# Allegro board CC2541EM.brd
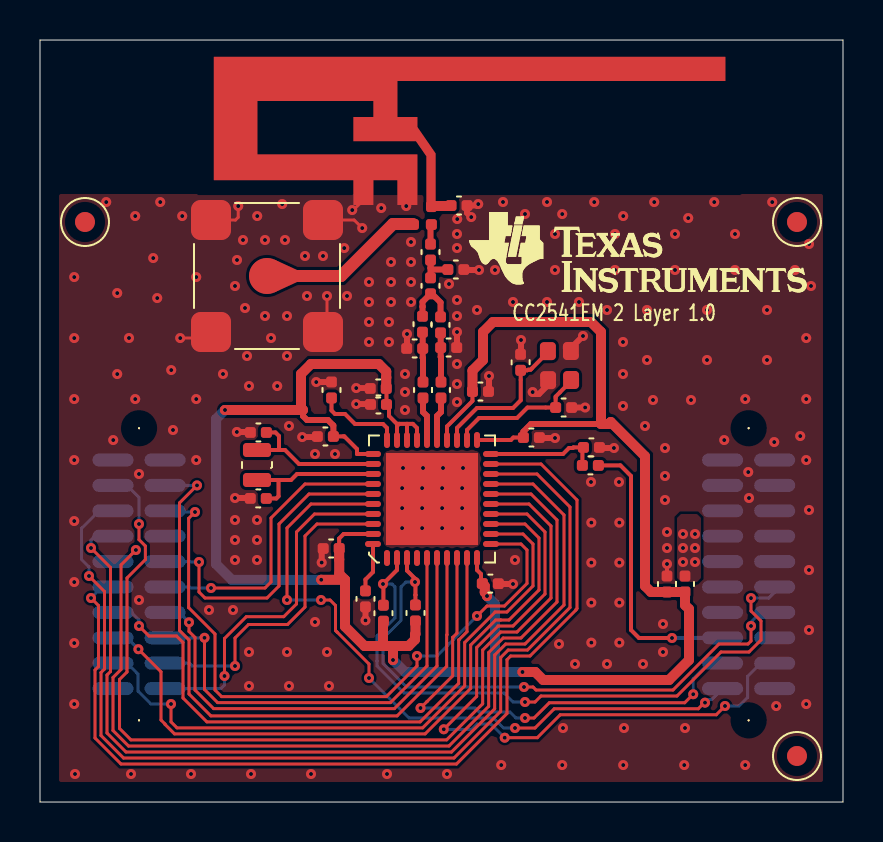
[diagram p0: board, top side]
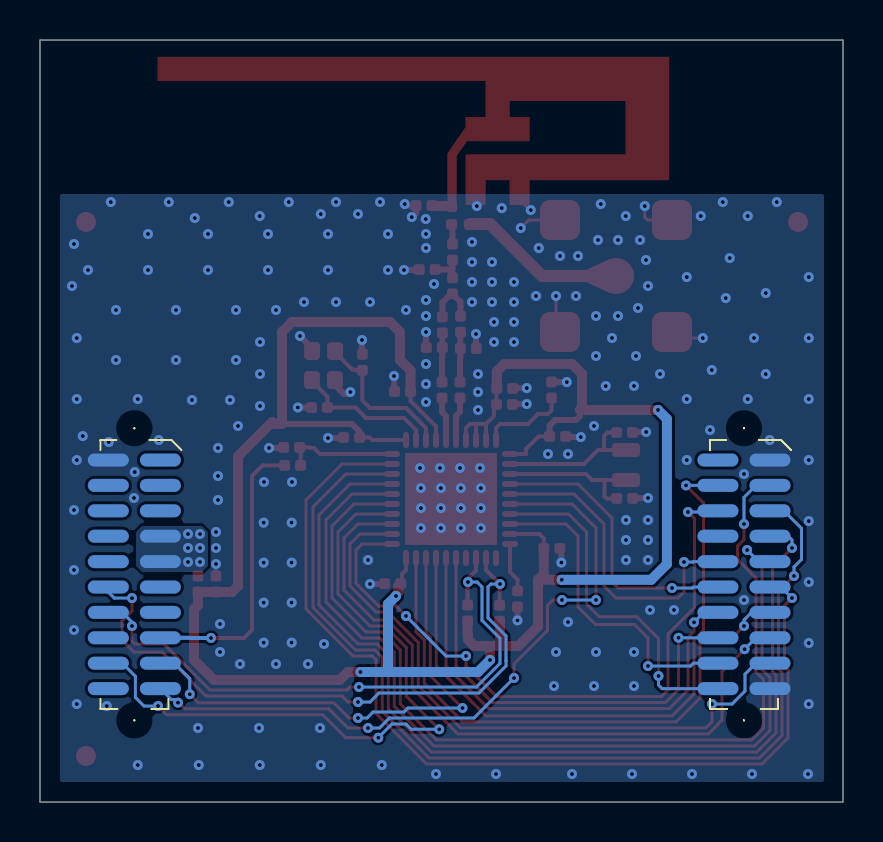
[diagram p1: board, bottom side, seen from below]

Outline 40.15 x 38.1 mm; copper layers: TOP, BOTTOM. Coordinates in mm from the lower left corner of the outline.
Outline path: 0,38.1 0,0 40.15,0 40.15,38.1 0,38.1

## Placement (name value [footprint] x y rotation side)
A1  2.4GHz  [ANTENNA_DN007]  19.55 30.1 0 top
C1  2.2uF  [CAPC1005X60L]  31.35 10.5 90 top
C101  100nF  [CAPC1005X60L]  22.12 10.92 359.5 top
C201  1nF  [CAPC1005X60L]  27.97 17.73 180 top
C211  100nF  [CAPC1005X60L]  24.17 18.22 0 top
C221  12pF  [CAPC1005X60L]  25.78 19.72 0.1 top
C231  12pF  [CAPC1005X60L]  24.03 21.59 90.4 top
C241  100nF  [CAPC1005X60L]  21.62 20.52 0 top
C251  18pF  [CAPC1005X60N]  20.05 20.2 90 top
C252  1pF  [CAPC1005X60N]  20.03 23.45 89.9 top
C253  1pF  [CAPC1005X60N]  20.39 26.62 0 top
C254  DNM  [CAPC1005X60L]  20.55 29.82 0 top
C261  18pF  [CAPC1005X60N]  19.15 20.2 90 top
C262  1pF  [CAPC1005X60N]  19.14 22.68 180 top
C271  100nF  [CAPC1005X60L]  17.32 19.88 179.9 top
C272  220pF  [CAPC1005X60L]  17.31 20.68 180.1 top
C311  100nF  [CAPC1005X60L]  14.67 18.28 180.2 top
C321  15pF  [CAPC1005X60N]  11.32 18.48 180 top
C331  15pF  [CAPC1005X60N]  11.31 15.18 179.8 top
C391  1uF  [CAPC1005X60N]  14.96 12.68 180.2 top
C401  1uF  [CAPC1005X60N]  16.27 10.56 270 top
FIDU1  FIDU_1MM  [FID100X115]  37.85 29 0 top
FIDU2  FIDU_1MM  [FID100X115]  37.85 2.3 0 top
FIDU3  FIDU_1MM  [FID100X115]  2.25 29 0 top
J1  SMA-10V21-TGG  [HUSTSAN_SMA10V21TGGAN]  11.35 26.3 0 top
L1  BLM15HG102SN1  [INDC1005X60L]  32.25 11.3 270 top
L251  2nH  [INDC1005X60N]  20.03 22.72 0 top
L252  1nH  [INDC1005X60L]  19.53 25.41 90.1 top
L253  3nH  [INDC1005X60N]  19.53 27.1 90.1 top
L261  2nH  [INDC1005X60N]  19.12 23.49 89.9 top
NOREF  -  []  0 36.8 0 top
NOREF#2  -  []  22.45 29.5 0 top
NOREF#3  -  []  36.94 0 90 top
P1  SFM-110-02-S-D-A-K-TR  [SAMTEC_SFM11002AN]  3.65 17.1 0 bottom
P2  SFM-110-02-S-D-A-K-TR  [SAMTEC_SFM11002AN]  34.13 17.1 0 bottom
R21  10k  [RESC1005X40N]  17.17 9.84 270.2 top
R31  10k  [RESC1005X40N]  18.77 9.85 270.1 top
R201  2.7k  [RESC1005X40L]  27.92 16.83 180 top
R251  0  [RESC1005X40BL]  19.57 28.87 179.9 top
R301  56k  [RESC1005X40L]  14.57 21 270 top
U2  CC2541F256  [QFNFC50P600X600X100-41L]  17.35 12.2 0 top
X1  32MHz  [XTAL_FA128L]  26.55 21.1 90.3 top
X2  32.768kHz  [XTAL_FC12MN]  10.85 16.1 90 top

## Library data of the parts
A1 = ANTENNA_DN007
C1 C101 C201 C211 C221 C231 C241 C251-C254 C261 C262 C271 C272 C311 C321 C331 C391 C401 = CAPACITOR: alternate symbols: (CAPC1005X60L,CAPC1005X60M)
FIDU1-FIDU3 = FIDMARK
J1 = CONN_COAX_1+4: alternate symbols: (HUSTSAN_SMA10V21TGGL,HUSTSAN_SMA10V21TGGM)
L1 L251-L253 L261 = INDUCTOR: alternate symbols: (INDC1005X60L,INDC1005X60M)
P1 P2 = CONN_HEADER_2X10_P_S: alternate symbols: (SAMTEC_SFM11002AL,SAMTEC_SFM11002AM)
R21 R31 R201 R301 = RESISTOR: alternate symbols: (RESC1005X40L,RESC1005X40M)
R251 = RESISTOR_3PORTS: alternate symbols: (RESC1005X40AL,RESC1005X40AM,RESC1005X40BL,RESC1005X40BM)
U2 = IC_RF_CC2541_QFN40_1: alternate symbols: (QFNFC50P600X600X100-41L,QFNFC50P600X600X100-41M)
X1 = XTAL_4: alternate symbols: (XTAL_FA128L,XTAL_FA128M)
X2 = XTAL: alternate symbols: (XTAL_FC12ML,XTAL_FC12MM)

## Footprints (pads in the part's own frame, mm; a bottom-side part is the same pattern mirrored in y, then rotated)
ANTENNA_DN007
  rect 0.46x0.5 smd: 1(0,0)
  rect 1x0.5 smd: 2(-1.18,0) 3(-3.38,0)
CAPC1005X60L
  custom 0.55x0.54 smd: 1(0,0) 2(0.8,0)
CAPC1005X60N
  custom 0.55x0.54 smd: 1(0,0) 2(0.8,0)
FID100X115
  oval 1x1 smd: 1(0,0)
HUSTSAN_SMA10V21TGGAN
  round 1.801 smd: 1(0,0)
  custom 2x2 smd: 2(-2.8,-2.8) 3(2.8,-2.8) 4(2.8,2.8) 5(-2.8,2.8)
INDC1005X60L
  custom 0.55x0.54 smd: 1(0,0) 2(0.8,0)
INDC1005X60N
  custom 0.55x0.54 smd: 1(0,0) 2(0.8,0)
QFNFC50P600X600X100-41L
  oval 0.3x0.8 smd: 1(0,0) 2(0.5,0) 3(1,0) 4(1.5,0) 5(2,0) 6(2.5,0) 7(3,0) 8(3.5,0) 9(4,0) 10(4.5,0) 21(4.5,5.9) 22(4,5.9) 23(3.5,5.9) 24(3,5.9) 25(2.5,5.9) 26(2,5.9) 27(1.5,5.9) 28(1,5.9) 29(0.5,5.9) 30(0,5.9)
  oval 0.8x0.3 smd: 11(5.2,0.7) 12(5.2,1.2) 13(5.2,1.7) 14(5.2,2.2) 15(5.2,2.7) 16(5.2,3.2) 17(5.2,3.7) 18(5.2,4.2) 19(5.2,4.7) 20(5.2,5.2) 31(-0.7,5.2) 32(-0.7,4.7) 33(-0.7,4.2) 34(-0.7,3.7) 35(-0.7,3.2) 36(-0.7,2.7) 37(-0.7,2.2) 38(-0.7,1.7) 39(-0.7,1.2) 40(-0.7,0.7)
  rect 4.6x4.6 smd: 41(2.25,2.95)
RESC1005X40BL
  custom 0.54x0.55 smd: 1(0,-0.9)
  custom 0.55x0.54 smd: 2(0,0) 3(0.9,0)
RESC1005X40L
  custom 0.55x0.54 smd: 1(0,0) 2(0.8,0)
RESC1005X40N
  custom 0.55x0.54 smd: 1(0,0) 2(0.8,0)
SAMTEC_SFM11002AN
  round 0.099 hole 1.501 unplated: (1.302,-1.588) (1.302,13.018)
  oval 2.05x0.65 smd: 1(0,0) 2(2.604,0) 3(0,1.27) 4(2.604,1.27) 5(0,2.54) 6(2.604,2.54) 7(0,3.81) 8(2.604,3.81) 9(0,5.08) 10(2.604,5.08) 11(0,6.35) 12(2.604,6.35) 13(0,7.62) 14(2.604,7.62) 15(0,8.89) 16(2.604,8.89) 17(0,10.16) 18(2.604,10.16) 19(0,11.43) 20(2.604,11.43)
XTAL_FA128L
  custom 0.9x0.798 smd: 1(0,0) 2(1.45,0) 3(1.45,1.15) 4(0,1.15)
XTAL_FC12MN
  custom 0.7x1.402 smd: 1(0,0) 2(1.5,0)

## Nets
GND_SIGNAL: A1.2(GND_2) A1.3(GND_3) C1.2 C101.2 C201.1 C211.2 C221.2 C231.2 C241.2 C253.2 C254.2 C262.2 C271.2 C272.2 C311.2 C321.2 C331.2 C391.2 C401.2 J1.2 J1.3 J1.4 J1.5 L251.2 P1.1 P1.19 P2.2 R301.1 U2.41(GND/EGP) X1.2 X1.4
VDD: C1.1 C101.1 C211.1 C241.1 C271.1 C272.1 C311.1 C391.1 L1.2 R21.2 R31.2 U2.10(DVDD2) U2.21(AVDD5) U2.24(AVDD3) U2.27(AVDD2) U2.28(AVDD1) U2.29(AVDD4) U2.31(AVDD6) U2.39(DVDD1)
VDD_EB: L1.1 P2.7 P2.9
P0_0: P1.11 U2.19(P0_0)
P0_1: P1.5 U2.18(P0_1)
P0_2: P1.7 U2.17(P0_2)
P0_3: P1.9 U2.16(P0_3)
P0_4: P1.3 U2.15(P0_4)
P0_5: P2.18 U2.14(P0_5)
P0_6: P1.15 U2.13(P0_6)
P0_7: P1.17 U2.12(P0_7)
P1_0: P1.6 U2.11(P1_0)
P1_1: P1.13 U2.9(P1_1)
P1_2: P2.17 U2.8(P1_2)
P1_3: P1.4 U2.7(P1_3)
P1_4: P1.14 U2.6(P1_4)
P1_5: P1.16 U2.5(P1_5)
P1_6: P1.18 U2.38(P1_6)
P1_7: P1.20 U2.37(P1_7)
P2_0: P2.19 U2.36(P2_0)
P2_1: P1.10 U2.35(P2_1)
P2_2: P1.12 U2.34(P2_2)
RESET_N: C201.2 R201.2 U2.20(NRESET)
RF_N: C261.1 U2.26(RF_N)
RF_P: C251.1 U2.25(RF_P)
SCL: P2.12 R21.1 U2.2(SCL)
SDA: P2.14 R31.1 U2.3(SDA)
N177477: C231.1 U2.23(XOSC_Q2) X1.3
N177564: C221.1 U2.22(XOSC_Q1) X1.1
N182554: J1.1 R251.3
N183414: P2.15 R201.1
N211544: A1.1(FEED_1) C254.1 R251.1
N231514: C331.1 U2.33(P2_3/XOSC32K_Q2) X2.1
N231518: C321.1 U2.32(P2_4/XOSC32K_Q1) X2.2
N236105: C251.2 C252.1 L251.1
N236109: C261.2 C262.1 L261.1
N236242: C252.2 L252.1 L261.2
N236262: C253.1 L252.2 L253.1
N236577: L253.2 R251.2
N239702: C401.1 U2.40(DCOUPL)
N239709: R301.2 U2.30(RBIAS)

Pads without a net: FIDU1 1; FIDU2 1; FIDU3 1; P1 2 8; P2 1 3 4 5 6 8 10 11 13 16 20; U2 1 4

## Via types
v1: diameter 0.5, hole 0.2, TOP to BOTTOM, 273 vias

## Routing (per net, layer and track width the routed paths; a pad name or vN(x,y) marks a point on that pad's centre or on a via; arc(x,y) is an arc through that point)
GND_SIGNAL: length 25.4
  TOP w0.15: J1.5 9.78,29.1 9.91,29.23 v1(9.91,29.8) ; v1(16.11,28.7) 15.71,29.1 J1.4 ; A1.3 15.67,29.6 v1(15.61,29.6) ; J1.2 8.25,23.2 v1(7.01,23.2) ; J1.3 14.35,23.7 v1(14.35,25.3) ; A1.2 18.31,30.04 v1(18.31,29.8)
  TOP w0.2: v1(31.35,11.9) C1.2
  TOP w0.3: v1(24.63,20.5) 24.73,20.4 24.95,20.4 25.4,20.85 25.4,21.09 ; C201.1 28,17.7 v1(28.7,17.7) ; C211.2 24.99,18.2 v1(25.75,18.2) ; 10.52,18.48 10.5,18.5 v1(9.84,18.5) ; 14.16,12.67 14.08,12.6 v1(14.08,11.97) ; X1.2 26.55,22.7 v1(27.15,23.3) ; 13.87,18.27 13.84,18.25 v1(13.11,18.25) ; C331.2 10.49,15.2 v1(9.75,15.2) ; v1(24.05,23.1) 24.05,22.41 24.03,22.38 ; v1(18.35,23.4) 18.35,22.69 18.34,22.68 ; v1(20.85,23.5) 20.85,22.74 L251.2 ; v1(22.45,21.3) 22.45,20.55 C241.2 ; v1(21.91,29.9) 21.84,29.82 C254.2 21.35,29.46 v1(21.56,29.25) ; v1(13.81,21) 14.57,21 R301.1 ; v1(16.28,9.08) C401.2 ; v1(15.81,20.7) 16.49,20.7 C272.2 ; C271.2 16.5,19.9 v1(15.81,19.9) ; v1(27.26,19.73) C221.2 ; C253.2 21.22,26.6 v1(21.95,26.6) ; 22.92,10.92 22.93,10.9 v1(23.65,10.9)
  vias: v1(1.71,26.25) v1(1.71,23.2) v1(1.71,20.15) v1(1.71,17.1) v1(1.71,14.05) v1(1.71,11) v1(1.71,7.95) v1(1.71,4.9) v1(1.75,1.4) v1(3.31,30) v1(3.66,18.1) v1(3.86,25.45) v1(3.86,21.4) v1(4.45,23.2) v1(4.55,1.4) v1(4.76,29.3) v1(4.76,20.15) v1(4.95,16.4) v1(4.95,10.1) v1(5.66,27.2) v1(5.86,25.2) v1(6.01,30) v1(6.56,21.6) v1(6.65,18.6) v1(7.11,29.3) v1(7.55,1.4) v1(7.81,26.25) v1(7.81,20.15) v1(7.81,17.1) v1(8.45,9.6) v1(9.15,21.4) v1(9.65,9.6) v1(9.75,25.8) v1(9.75,14.1) v1(9.75,13.1) v1(9.75,12.1) v1(9.85,27.1) v1(10.15,28.1) v1(10.25,24.7) v1(10.35,22.3) v1(10.45,20.8) v1(10.45,7.5) v1(10.45,5.8) v1(10.55,1.4) v1(10.86,29.3) v1(10.85,14.1) v1(10.85,13.1) v1(10.85,12.1) v1(11.25,28.1) v1(11.25,24.3) v1(11.55,23.2) v1(11.86,20.8) v1(12.11,29.9) v1(12.25,28.1) v1(12.35,24.3) v1(12.35,22.3) v1(12.35,7.5) v1(12.45,18.8) v1(12.45,5.8) v1(13.25,27.3) v1(13.35,25.3) v1(13.55,1.4) v1(13.75,17.4) v1(13.75,9) v1(14.15,27.3) v1(14.35,7.5) v1(14.45,5.8) v1(14.75,17.4) v1(15.21,27.7) v1(15.35,25.3) v1(16.45,26) v1(16.45,25) v1(16.45,24) v1(16.45,23) v1(17.06,29.7) v1(17.35,1.4) v1(17.45,24) v1(17.45,23) v1(17.55,27) v1(17.55,26) v1(17.55,25) v1(18.15,16.7) v1(18.11,15.7) v1(18.11,14.7) v1(18.11,13.7) v1(18.25,21.4) v1(18.25,20.5) v1(18.25,19.6) v1(18.55,28) v1(18.55,27) v1(18.55,26) v1(18.55,25) v1(19.15,16.7) v1(19.11,15.7) v1(19.11,14.7) v1(19.11,13.7) v1(20.15,16.7) v1(20.11,15.7) v1(20.11,14.7) v1(20.11,13.7) v1(20.35,1.4) v1(20.45,25.9) v1(20.86,29.15) v1(20.85,28.4) v1(20.85,27.7) v1(20.85,25.1) v1(20.85,24.3) v1(20.85,21.9) v1(20.85,20.9) v1(20.85,20) v1(21.15,16.7) v1(21.11,15.7) v1(21.11,14.7) v1(21.11,13.7) v1(21.85,24.6) v1(22.75,28.4) v1(22.75,26.6) v1(23.06,1.85) v1(23.15,30) v1(23.65,25) v1(23.75,12.1) v1(24.25,29.4) v1(25.35,30) v1(25.35,25) v1(25.75,28.4) v1(25.75,26.6) v1(25.95,7.9) v1(26.11,29.4) v1(26.15,3.7) v1(26.11,1.85) v1(26.75,6.9) v1(26.95,25) v1(27.55,16) v1(27.57,13.97) v1(27.57,11.97) v1(27.57,9.97) v1(27.57,7.97) v1(27.71,30) v1(28.35,24.6) v1(28.35,6.9) v1(28.75,28.4) v1(28.75,26.6) v1(28.95,16) v1(28.97,13.97) v1(28.97,11.97) v1(28.97,9.97) v1(28.97,7.97) v1(29.16,29.3) v1(29.15,23) v1(29.15,21.4) v1(29.15,19.8) v1(29.2,3.7) v1(29.16,1.85) v1(30.15,6.9) v1(30.25,18.8) v1(30.35,24.6) v1(30.35,22.1) v1(30.65,20.1) v1(30.71,30) v1(31.15,8.9) v1(31.15,7.5) v1(31.25,17.7) v1(31.25,16.3) v1(31.25,15.1) v1(31.35,13.5) v1(31.35,12.7) v1(31.75,28.4) v1(31.75,26.6) v1(32.25,3.7) v1(32.21,1.85) v1(32.41,29.2) v1(32.55,20.1) v1(33.35,24.6) v1(33.35,22.1) v1(33.71,30) v1(34.21,18.1) v1(34.75,28.4) v1(34.75,26.6) v1(35.26,20.15) v1(35.26,1.85) v1(35.41,16.5) v1(35.45,15.2) v1(36.35,24.6) v1(36.35,22.1) v1(36.61,30) v1(36.71,18) v1(36.81,4.8) v1(37.75,26.6) v1(38.01,18.3) v1(38.31,23.2) v1(38.31,20.15) v1(38.31,17.1) v1(38.31,4.9) v1(38.45,27.9) v1(38.45,14.6) v1(38.45,11.6) v1(38.45,8.6) v1(38.55,25.8)
VDD: length 110
  TOP w0.2: U2.24 20.35,18.78 21.62,20.05 C241.1 ; 17.96,18.91 17.84,18.91 17.45,19.3 17.45,19.75 C271.1 17.32,20.66 C272.1 ; 17.96,18.91 18.35,18.91 ; 17.96,18.91 17.85,18.8 U2.29 ; U2.27 18.85,18.7 18.64,18.91 18.35,18.91 ; U2.10 21.85,11.6 22.05,11.4 22.05,10.99 C101.1 ; 18.35,18.91 U2.28 ; U2.21 23.54,18.1 23.67,18.22 C211.1 ; U2.31 15.85,17.4 15.85,17.65 15.22,18.28 15.17,18.28 C311.1 ; U2.39 15.18,13.4 14.96,13.17 C391.1
  TOP w0.3: 13.15,19.6 13.15,19.3 13.35,19.1 14.39,19.1 14.67,18.83 C311.1 ; 28.05,18.9 24.55,18.9 24.17,18.52 C211.1
  TOP w0.5: C272.1 17.31,21.23 17.31,21.23 17.31,21.53 16.94,21.9 13.55,21.9 13.05,21.4 13.05,19.7 13.15,19.6 v1(9.25,19.6) ; v1(17.65,7.1) 17.65,7.8 ; 17.65,7.8 17.15,7.8 ; 17.65,7.8 18.43,7.8 18.75,8.12 18.75,8.37 18.77,8.4 18.77,9.05 ; 15.25,11.11 15.25,8.77 16.22,7.8 17.15,7.8 ; 15.25,11.11 14.96,11.4 14.96,12.13 C391.1 ; 15.25,11.11 v1(14.06,11.11) ; 17.15,7.8 17.15,9.02 R21.2 ; C241.1 21.62,21.57 22.15,22.1 22.15,23.5 22.65,24 27.55,24 28.05,23.5 28.05,18.9 28.44,18.9 28.54,19 30.25,17.29 30.25,10.8 30.55,10.5 C1.1 L1.2 32.25,9.85 32.45,9.65 32.45,7.1 31.45,6.1 25.16,6.1 24.76,6.5 v1(24.13,6.5) ; C101.1 22.24,10.8 22.24,10.49 22.35,10.37 v1(22.35,10.3)
  BOTTOM w0.5: v1(9.25,19.6) 8.8,19.16 8.8,11.9 9.59,11.11 v1(14.06,11.11) ; 22.75,6.5 18.25,6.5 v1(17.65,7.1) ; 22.75,6.5 v1(24.13,6.5) ; 22.75,6.5 22.75,9.9 v1(22.35,10.3)
VDD_EB:
  vias: v1(32.15,13.4) v1(32.15,12.7) v1(32.15,12) v1(32.75,13.4) v1(32.75,12.7) v1(32.75,12)
P0_0: length 48.5
  TOP w0.15: U2.19 25.05,16.9 26.85,15.1 26.85,9.67 26.8,9.62 26.8,9.6 24.5,7.3 23.54,7.3 23.35,7.12 23.35,4.42 20.82,1.9 4.05,1.9 2.75,3.2 2.75,6.6 2.93,6.78 2.93,9.82 v1(2.55,10.2)
  BOTTOM w0.15: v1(2.55,10.2) 3.1,10.75 P1.11
P0_1: length 51.1
  TOP w0.15: v1(2.45,11.3) 3.23,10.53 3.23,6.65 3.05,6.47 3.05,3.33 4.18,2.2 20.7,2.2 23.03,4.53 23.03,7.22 23.41,7.6 24.38,7.6 26.5,9.72 26.5,14.75 24.85,16.4 U2.18
  BOTTOM w0.15: v1(2.45,11.3) 2.45,11.75 2.08,12.13 2.08,13.69 2.95,14.56 P1.5
P0_2: length 48
  TOP w0.15: U2.17 24.65,15.9 26.2,14.35 26.2,9.85 24.25,7.9 23.29,7.9 22.73,7.35 22.73,4.66 20.57,2.5 4.3,2.5 3.35,3.45 3.35,6.35 3.53,6.53 3.53,11.72 v1(2.55,12.7)
  BOTTOM w0.15: P1.7 2.74,13.29 2.55,13.1 v1(2.55,12.7)
P0_3: length 45.9
  TOP w0.15: U2.16 24.55,15.4 25.85,14.1 25.85,10 24.05,8.2 23.16,8.2 22.43,7.47 22.43,4.78 20.45,2.8 4.43,2.8 3.65,3.58 3.65,6.22 4.05,6.62 4.05,11.85 v1(4.79,12.6)
  BOTTOM w0.15: P1.9 3.83,12.2 4.4,12.2 v1(4.79,12.6)
P0_4: length 47.1
  TOP w0.15: U2.15 24.45,14.9 25.55,13.8 25.55,10.2 23.85,8.5 23.04,8.5 22.13,7.6 22.13,4.91 20.33,3.11 4.55,3.11 3.98,3.68 3.98,6.13 4.35,6.5 4.35,11.2 5.27,12.12 5.27,12.8 4.95,13.12 v1(4.95,13.9)
  BOTTOM w0.15: v1(4.95,13.9) 4.95,15.23 4.35,15.83 P1.3
P0_5: length 34.6
  TOP w0.15: v1(20.19,3.64) 21.83,5.28 21.83,7.72 22.91,8.8 23.65,8.8 25.25,10.4 25.25,13.5 24.35,14.4 U2.14 ; v1(23.24,3.21) 24.86,3.21 26.01,4.36 33.81,4.36 v1(34.25,4.8)
  BOTTOM w0.15: v1(23.24,3.21) 22.55,3.9 21.85,3.9 21.59,3.64 v1(20.19,3.64) ; P2.18 36.03,6.94 35.38,6.29 35.38,5.23 34.95,4.8 v1(34.25,4.8)
P0_6: length 34.3
  TOP w0.15: v1(4.92,7.64) 6.05,6.51 6.05,4.1 6.25,3.9 6.25,3.88 6.73,3.41 19.26,3.41 21.53,5.68 21.53,7.85 22.79,9.1 23.03,9.1 23.45,9.1 24.95,10.6 24.95,13.2 24.25,13.9 U2.13
  BOTTOM w0.15: v1(4.92,7.64) 4.35,8.21 P1.15
P0_7: length 32
  TOP w0.15: v1(6.55,4.9) 6.55,4.01 6.85,3.71 19.13,3.71 21.23,5.81 21.23,7.97 22.76,9.5 23.35,9.5 24.65,10.8 24.65,12.9 24.15,13.4 U2.12
  BOTTOM w0.15: v1(6.55,4.9) 5.55,4.9 4.9,5.55 4.9,6.39 4.35,6.94 P1.17
P1_0: length 33.1
  TOP w0.15: v1(7.75,14.5) 7.43,14.18 7.43,9.72 8.75,8.4 8.75,5.6 9.08,5.27 17.32,5.27 18.85,6.8 v1(18.85,7.3) ; v1(21.85,9.3) 22.35,9.8 23.22,9.8 24.35,10.93 24.35,12.6 24.05,12.9 U2.11
  BOTTOM w0.15: v1(7.75,14.5) 6.51,14.5 6.45,14.56 P1.6 ; v1(18.85,7.3) 19.85,7.3 v1(21.85,9.3)
P1_1: length 28.6
  TOP w0.15: U2.9 21.35,8.52 20.95,8.12 20.93,8.1 20.93,5.93 19.01,4.01 8.34,4.01 7.15,5.2 7.15,7.98 6.83,8.3 5.45,8.3 v1(4.95,8.8)
  BOTTOM w0.15: v1(4.95,8.8) 4.95,9.1 4.57,9.48 P1.13
P1_2: length 25.2
  TOP w0.15: v1(24.25,4.2) 24.7,4.2 25.46,4.96 32.23,4.96 v1(32.66,5.39) ; U2.8 20.85,8.44 20.65,8.24 20.63,8.22 20.63,6.31 19.35,5.02 v1(19.03,4.7)
  BOTTOM w0.15: v1(32.66,5.39) 32.66,6.17 33.43,6.94 P2.17 ; v1(24.25,4.2) 23.8,4.2 23.5,4.5 21.95,4.5 21.75,4.7 v1(19.03,4.7)
P1_3: length 32.4
  TOP w0.15: U2.7 20.35,8.37 20.33,8.35 20.33,6.78 17.86,4.31 8.54,4.31 7.45,5.4 7.45,8.1 6.98,8.58 6.98,14.96 v1(7.85,15.83)
  BOTTOM w0.15: P1.4 v1(7.85,15.83)
P1_4: length 23.7
  TOP w0.15: v1(7.45,8.98) 7.45,8.53 7.75,8.23 7.75,5.6 8.68,4.67 17.72,4.67 19.85,6.8 U2.6
  BOTTOM w0.15: v1(7.45,8.98) 6.95,9.48 P1.14
P1_5: length 22.1
  TOP w0.15: v1(8.23,8.21) 8.23,5.62 8.88,4.97 17.52,4.97 19.35,6.8 U2.5
  BOTTOM w0.15: P1.16 v1(8.23,8.21)
P1_6: length 16.3
  TOP w0.15: v1(9.75,6.8) 9.75,8.2 10.42,8.87 12.38,8.87 13.25,9.75 13.25,13.3 13.85,13.9 U2.38
  BOTTOM w0.15: P1.18 7.48,6.94 7.62,6.8 v1(9.75,6.8)
P1_7: length 17.5
  TOP w0.15: v1(9.23,6.3) 9.23,8.17 10.31,9.26 12.19,9.26 12.82,9.9 12.82,13.5 13.73,14.4 U2.37
  BOTTOM w0.15: P1.20 9.05,5.67 9.23,5.85 v1(9.23,6.3)
P2_0: length 34.8
  TOP w0.15: U2.36 13.55,14.9 12.35,13.7 v1(12.35,10.1) ; v1(16.45,6.2) 16.45,6.9 14.85,8.5 14.78,8.58 14.78,9.83 14.5,10.1 v1(14.05,10.1) ; v1(33.25,4.97) 33.22,4.97 32.91,4.66 25.71,4.66 24.75,3.7 v1(23.75,3.7)
  BOTTOM w0.15: v1(16.45,6.2) 18.45,4.2 22.68,4.2 23.18,3.7 v1(23.75,3.7) ; P2.19 33.58,5.12 33.4,5.12 v1(33.25,4.97) ; v1(14.05,10.1) v1(12.35,10.1)
P2_1: length 16
  TOP w0.15: U2.35 13.45,15.4 11.95,13.9 11.95,10.8 11.35,10.2 8.25,10.2 7.95,10.5 v1(7.95,12)
  BOTTOM w0.15: P1.10 7.48,12.02 7.5,12 v1(7.95,12)
P2_2: length 14.4
  TOP w0.15: v1(8.55,10.7) 11.25,10.7 11.55,11 11.55,14.2 13.25,15.9 U2.34
  BOTTOM w0.15: P1.12 7.48,10.75 7.53,10.7 v1(8.55,10.7)
RESET_N: length 5.7
  TOP w0.2: U2.20 26.15,17.4 26.45,17.7 26.64,17.7 26.67,17.73 C201.2 27.12,17.68 27.12,16.83
RF_N: length 2.2
  TOP w0.3: U2.26 19.35,19.3 19.15,19.5 C261.1
RF_P: length 2.2
  TOP w0.3: U2.25 19.85,19.3 20.05,19.5 C251.1
SCL: length 32.8
  TOP w0.15: v1(35.55,10.19) 35.55,9.55 36.05,9.05 36.05,8.1 35.45,7.5 34.05,7.5 31.85,5.3 25.05,5.3 24.75,5 v1(24.25,5) ; v1(17.15,10.9) 17.17,10.92
  TOP w0.2: U2.2 17.85,11.6 17.17,10.92 R21.1
  BOTTOM w0.15: v1(17.15,10.9) 17.6,10.9 17.75,10.75 17.75,9.21 16.85,8.3 16.85,7.05 16.85,6.8 18.2,5.45 23.2,5.45 23.65,5 v1(24.25,5) ; v1(35.55,10.19) 36.43,10.19 36.73,10.49 P2.12
SDA: length 30
  TOP w0.15: v1(18.75,11) 18.75,11.17 ; v1(24.2,5.75) 24.65,5.75 24.8,5.6 31.65,5.6 33.95,7.9 35.4,7.9 35.55,8.05 v1(35.55,8.8)
  TOP w0.2: U2.3 18.35,11.57 18.77,11.15 18.77,10.35 18.77,10.35 R31.1
  BOTTOM w0.15: v1(35.55,8.8) 35.55,9 36.03,9.48 P2.14 ; v1(18.75,11) 18.3,11 18.05,10.75 18.05,9.08 17.15,8.18 17.15,6.93 18.33,5.75 v1(24.2,5.75)
N177477: length 7.6
  TOP w0.2: X1.3 25.4,22.49 24.59,21.67 24.53,21.62 24.41,21.62 24.36,21.59 C231.1 24.04,21.11 24.04,20.09 23.65,19.7 21.85,19.7 20.85,18.7 U2.23
N177564: length 7.1
  TOP w0.2: U2.22 21.35,18.6 21.95,19.2 23.85,19.2 24.37,19.72 25.28,19.72 C221.1 25.78,20.2 25.78,20.27 26,20.48 26.55,21.05 X1.1
N182554: length 8.4
  TOP w0.15: 18.65,28.9 18.67,28.88 R251.3
  TOP w0.6: J1.1 15.05,26.3 17.65,28.9 18.65,28.9
N183414: length 14.3
  TOP w0.2: v1(31.6,8.2) 29.95,8.2 29.55,8.6 29.55,16.3 29.02,16.83 R201.1
  BOTTOM w0.15: 32.67,8.21 32.66,8.2
  BOTTOM w0.2: 32.66,8.2 v1(31.6,8.2) ; P2.15 32.67,8.21
N211544: length 1.6
  TOP w0.15: R251.1 19.57,30.08 A1.1 19.55,29.8
  TOP w0.5: 19.55,29.8 20.53,29.8 C254.1
N231514: length 7.4
  TOP w0.2: 11.95,16.1 X2.1 ; 11.95,16.1 11.93,16.08 11.93,15.28 11.82,15.17 C331.1 ; 11.95,16.1 12.55,16.1 12.85,16.4 U2.33
N231518: length 7.5
  TOP w0.2: C321.1 11.77,18.48 11.95,18.3 11.95,17.6 ; U2.32 12.95,16.9 12.25,17.6 11.95,17.6 ; 11.95,17.6 X2.2
N236105: length 2.5
  TOP w0.3: C252.1 20.03,23.45 L251.1 20.03,22.25 20.05,22.23 C251.2
N236109: length 2.5
  TOP w0.3: L261.1 19.14,23.48 C262.1 19.14,22.2 19.15,22.19 C261.2
N236242: length 2.7
  TOP w0.3: 19.12,24.29 19.12,25.01 L252.1 19.6,25.41 20.03,24.98 20.03,24.26
N236262: length 1.8
  TOP w0.3: C253.1 19.6,26.62 19.53,26.7 ; L252.2 19.53,26.7 ; 19.53,26.7 L253.1
N236577: length 1
  TOP w0.3: L253.2 19.53,28.83 R251.2
N239702: length 2.5
  TOP w0.2: U2.40 16.65,11.5 16.27,11.12 C401.1
N239709: length 4.4
  TOP w0.2: U2.30 17.35,18.7 17.15,18.9 15.75,18.9 15.25,19.4 14.75,19.4 14.57,19.58 14.57,20.2

## Copper pours and planes (outline as drawn; the poured copper is in the pictures)
GND_SIGNAL on TOP (solid shape): 34.27,36.05 17.87,36.05 17.87,34.25 18.87,34.25 18.87,33.75 19.78,32.43 19.78,30.35 19.32,30.35 19.32,32.29 18.8,33.04 15.67,33.04 15.67,34.25 16.67,34.25 16.67,35.05 10.87,35.05 10.87,32.38 18.87,32.38 18.87,30.35 17.87,30.35 17.87,31.09 16.67,31.09 16.67,30.35 15.67,30.35 15.67,31.09 8.69,31.09 8.69,37.26 34.27,37.26
GND_SIGNAL on TOP: 0.95,1 0.95,30.4 39.15,30.4 39.15,1 ; 9 cut-outs
GND_SIGNAL on BOTTOM: 0.95,1 0.95,30.4 39.15,30.4 39.15,1 ; 9 cut-outs
VDD_EB on TOP: 31.85,14.2 31.85,11.2 32.05,11 32.85,11 33.05,11.2 33.05,14.2 32.85,14.4 32.05,14.4
VDD_EB on BOTTOM: 32.05,13.8 35.05,13.8 35.35,13.5 35.35,11.8 35.05,11.5 32.05,11.5 31.75,11.8 31.75,13.5
N182554 on TOP (solid shape): 12.91,26.57 13.08,26.3 12.91,26.03 11.73,25.48 11.28,26.3 11.73,27.12

## Text on the board
Ref Des/Silkscreen Top: CC2541EM 2 Layer 1.0
XSECTION_CHART: L1: TOP CONDUCTOR - COPPER 0.035 MM | *  DIELECTRIC - FR-4 0.8 MM | L2: BOTTOM CONDUCTOR - COPPER 0.035 MM | DESIGN CROSS SECTION CHART | ___________________________ | TOTAL THICKNESS 0.87 MM
User.5: FIGURE | SIZE | 0.2 | 1.501 | DRILL CHART: TOP to BOTTOM | ALL UNITS ARE IN MILLIMETERS | PLATED | NON-PLATED | QTY | 273 | 4
